# Altium PCB Power Board UCC28951.PcbDoc
Units mm, origin at the board's own origin, x right, y up, seen from the top; angles counter-clockwise.
Board outline 380 x 160 mm, 2 copper layers (Top Layer, Bottom Layer); 35 components, 230 nets, 139 pads, 0 vias.
Unrouted connection lines stored in the file: 72.
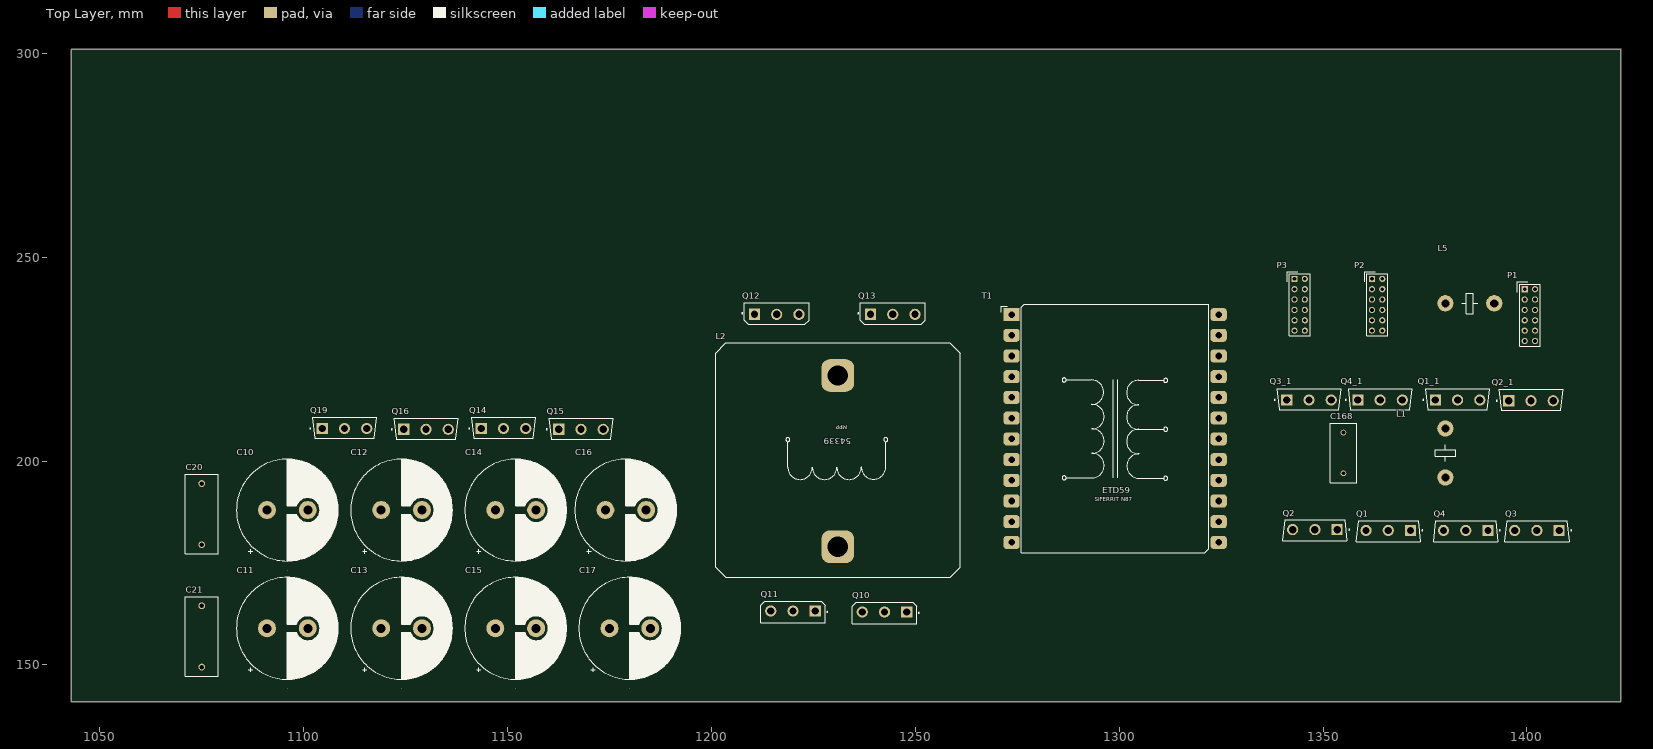
[diagram p0: Top Layer view]
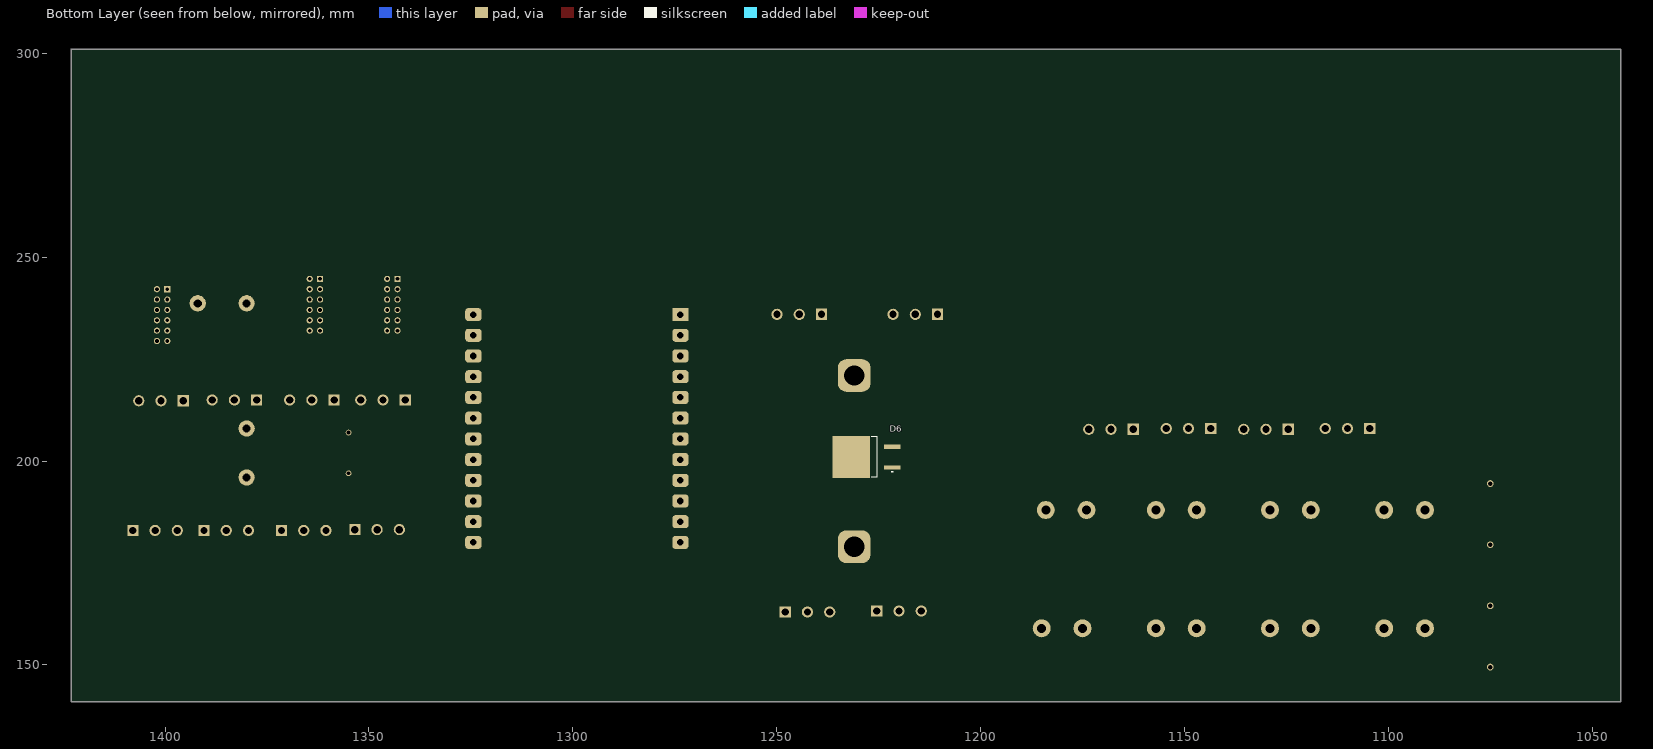
[diagram p1: Bottom Layer view, seen from below]

## Layer stack, top to bottom
Top Solder: solder mask 0.0254, SM-003, Dk 4
Top Layer: signal copper 0.0356
Dielectric 1: dielectric 0.32, FR-4, Dk 4.8
Bottom Layer: signal copper 0.0356
Bottom Solder: solder mask 0.0254, SM-003, Dk 4

## Board outline
1043,141 1423,141 1423,301 1043,301

## Design rules (kind name [scope] priority, off if disabled: settings)
Clearance "Schematic Clearance Constraint_1" [InNet('300V_HV')] p1: gap=1.27 ignorepadtopadclearanceinfootprint=FALSE except(0: Arc-Hole Track-Hole SMDPad-Hole THPad-Hole Via-Hole Fill-Hole Poly-Hole Region-Hole Text-Hole; 0.254: Arc-Text Track-Text SMDPad-Text THPad-Text Via-Text Fill-Text Poly-Text Region-Text Text-Text)
Clearance "Schematic Clearance Constraint" [InNet('LIVE')] p2: gap=1.27 ignorepadtopadclearanceinfootprint=FALSE except(0: Arc-Hole Track-Hole SMDPad-Hole THPad-Hole Via-Hole Fill-Hole Poly-Hole Region-Hole Text-Hole; 0.254: Arc-Text Track-Text SMDPad-Text THPad-Text Via-Text Fill-Text Poly-Text Region-Text Text-Text)
Clearance [All] p3: gap=0.254 ignorepadtopadclearanceinfootprint=FALSE except(0: Arc-Hole Track-Hole SMDPad-Hole THPad-Hole Via-Hole Fill-Hole Poly-Hole Region-Hole Text-Hole)
Height [All] p1: minheight=0 maxheight=80 prefheight=12.7
PolygonConnect [All] p1: connectstyle=Relief reliefconductorwidth=0.254 reliefentries=4 polygonreliefangle="90 Angle" airgapwidth=0.254
RoomDefinition "U_PCIE98 Break Out" [InComponentClass('U_PCIE98 Break Out')] p1: confinementstyle=ConfineIn formatcopy=TRUE lockcomponents=FALSE outline -27,-227 23.8,-227 23.8,-201.6 -27,-201.6
RoutingVias [All] p1: holewidth=0.711 width=1.27 viastyle="Through Hole" minholewidth=0.711 minwidth=1.27 maxholewidth=0.711 maxwidth=1.27
SolderMaskExpansion [All] p1: expansion=0.102 istentingtop=FALSE
Width [All] p1: maxlimit=0.254 minlimit=0.254 preferedwidth=0.254
29 further rules are at their usual default settings.

## Classes and differential pairs
component class "U_Synchronous Rectification Stage": Q10 Q11 Q12 Q13
component class "U_Fan Control": D7 D28
component class U_E_Switch_Outlet: Q14 Q15 Q16 Q19
component class "U_Power Circuit": C10 C11 C12 C13 C14 C15 C16 C17 C20 C21 C168 D6 L1 L2 Q1 Q2 Q3 Q4 T1
component class "U_EMI Stage Break Out": L5 P1 P2 P3

## Components (designator, comment, footprint, x,y, rotation, side; value= is the part's Value field where it differs from the comment)
C10 "Cap Pol1" 450V_25mm_Dia_10mm_pitch 1096,188 r0 top value=100pF
C11 "Cap Pol1" 450V_25mm_Dia_10mm_pitch 1096,159 r0 top value=100pF
C12 "Cap Pol1" 450V_25mm_Dia_10mm_pitch 1124,188 r0 top value=100pF
C13 "Cap Pol1" 450V_25mm_Dia_10mm_pitch 1124,159 r0 top value=100pF
C14 "Cap Pol1" 450V_25mm_Dia_10mm_pitch 1152,188 r0 top value=100pF
C15 "Cap Pol1" 450V_25mm_Dia_10mm_pitch 1152,159 r0 top value=100pF
C16 "Cap Pol1" 450V_25mm_Dia_10mm_pitch 1179,188 r0 top value=100pF
C17 "Cap Pol1" 450V_25mm_Dia_10mm_pitch 1180,159 r0 top value=100pF
C20 "1uF, 250V" L18_W7_H13_P15 1075,187 r270 top
C21 "1uF, 250V" L18_W7_H13_P15 1075,157 r270 top
C168 "47nF, 630V" L13_W5.5_H11_P10 1355,202 r90 top
D6 "MURB1620CTT4G" "DPAK254P1542X450-3N - diode" 1228,201 r0 bottom
L1 "Transformer_Inductor" "Shim Inductor" 1380,208 r270 top
L2 "Transformer_Inductor" Toroid_54439_2 1231,179 r90 top
L5 "Transformer_Inductor" "Shim Inductor" 1380,238.7 r0 top
P1 "Header 6X2H" Header_6X2 1399.46,242.16 r0 top
P2 "Header 6X2H" Header_6X2 1362,244.7 r0 top
P3 "Header 6X2H" Header_6X2 1343,244.7 r0 top
Q1 "STW55NM60ND" FP-TO-247-0075325-MFG#1 1366,182.8 r270 top
Q1_1 "STW55NM60ND" FP-TO-247-0075325-MFG#1 1383,215.2 r90 top (schematic designator Q1)
Q2 "STW55NM60ND" FP-TO-247-0075325-MFG#1 1348,183 r270 top
Q2_1 "STW55NM60ND" FP-TO-247-0075325-MFG#1 1401,215 r90 top (schematic designator Q2)
Q3 "STW55NM60ND" FP-TO-247-0075325-MFG#1 1402.45,182.8 r270 top
Q3_1 "STW55NM60ND" FP-TO-247-0075325-MFG#2 1346.55,215.2 r90 top (schematic designator Q3)
Q4 "STW55NM60ND" FP-TO-247-0075325-MFG#1 1385,182.8 r270 top
Q4_1 "STW55NM60ND" FP-TO-247-0075325-MFG#2 1364,215.2 r90 top (schematic designator Q4)
Q10 "IRFP240PBF" FP-E19-0614-MFG 1242.46,162.762 r270 top
Q11 "IRFP240PBF" FP-E19-0614-MFG 1220,163 r270 top
Q12 "IRFP240PBF" FP-E19-0614-MFG 1216,236.238 r90 top
Q13 "IRFP240PBF" FP-E19-0614-MFG 1244.46,236.238 r90 top
Q14 "STW55NM60ND" FP-TO-247-0075325-MFG#2 1149,208.2 r90 top
Q15 "STW55NM60ND" FP-TO-247-0075325-MFG#2 1168,208 r90 top
Q16 "STW55NM60ND" FP-TO-247-0075325-MFG#2 1130,208 r90 top
Q19 "STW55NM60ND" FP-TO-247-0075325-MFG#2 1110,208.2 r90 top
T1 "Transformer_Centre_Tap_Secondaru_Aux_1" ETD59 1299,208 r0 top

## Footprints (in the part's own frame and the unit in brackets; to place one, negate y for a bottom-side part, rotate by r counter-clockwise, add the part's x,y. Pads: shape width x height; smd on the part's side, far side on the other; paste and mask are expansions set on the pad)
450V_25mm_Dia_10mm_pitch [mm]
  round 4.4 hole 2.2: 1(-5,0) 2(5,0)
  silkscreen extent -12.5,-14.75 12.5,12.5, body extent -12.7,-12.7 12.7,12.7, height 42.7
"DPAK254P1542X450-3N - diode" [mm] "D2-PAK, 3-Pads, Body 7.60x8.36mm (max), IPC Medium Density"
  rect 3.95x1.05 smd: 1(-6.35,2.54) 3(-6.35,-2.54)
  rect 9.1x10.2 smd: 4(3.7,0)
  silkscreen extent -6.47,-5 -1.25,5, body extent -7.5,-5 7.5,5, height 4.67
ETD59 [mm]
  rect 4x3.2 hole 1.6: 1(-25.4,27.94)
  rrect50% 4x3.2 hole 1.6: 2(-25.4,22.86) 3(-25.4,17.78) 4(-25.4,12.7) 5(-25.4,7.62) 6(-25.4,2.54) 7(-25.4,-2.54) 8(-25.4,-7.62) 9(-25.4,-12.7) 10(-25.4,-17.78) 11(-25.4,-22.86) 12(-25.4,-27.94) 13(25.4,-27.94) 14(25.4,-22.86) 15(25.4,-17.78) 16(25.4,-12.7) 17(25.4,-7.62) 18(25.4,-2.54) 19(25.4,2.54) 20(25.4,7.62) 21(25.4,12.7) 22(25.4,17.78) 23(25.4,22.86) 24(25.4,27.94)
  silkscreen extent -27.9,-30.48 22.97,30.48, body extent -32.95,-35.86 33.15,31.04, height 51.31
FP-E19-0614-MFG [mm]
  rect 2.75x2.75 hole 1.8 paste-1000 mask+0: 1(-0.238,5.46)
  round 2.75 hole 1.8 paste-1000 mask+0: 2(-0.238,0) 3(-0.238,-5.46)
  silkscreen extent -2.66,-7.94 2.66,8.56, body extent -2.76,-8.04 2.76,8.04, height 0.25
FP-TO-247-0075325-MFG#1 [mm]
  rect 2.75x2.75 hole 1.8: 1(-0.2,5.45)
  round 2.75 hole 1.8: 2(-0.2,0) 3(-0.2,-5.45)
  silkscreen extent -2.58,-7.88 2.58,8.5, body extent -2.68,-7.98 2.68,7.98, height 0.25
FP-TO-247-0075325-MFG#2 [mm]
  rect 2.75x2.75 hole 1.8 paste-1000 mask+0: 1(-0.2,5.45)
  round 2.75 hole 1.8 paste-1000 mask+0: 2(-0.2,0) 3(-0.2,-5.45)
  silkscreen extent -2.58,-7.88 2.58,8.5, body extent -2.68,-7.98 2.68,7.98, height 0.25
Header_6X2 [mil]
  rect 60x60 hole 35.43: 1(0,0)
  round 60 hole 35.43: 2(100,0) 3(0,-100) 4(100,-100) 5(0,-200) 6(100,-200) 7(0,-300) 8(100,-300) 9(0,-400) 10(100,-400) 11(0,-500) 12(100,-500)
  silkscreen extent -70,-550 150,70, body extent -13,-550 495,50, height 200
L13_W5.5_H11_P10 [mm] "Film Capacitors, 13x5.5x11mm"
  round 1.4 hole 0.9: 1(-5,0) 2(5,0)
  silkscreen extent -7.25,-3.25 7.25,3.25, body extent -6.5,-2.75 6.5,2.75, height 11.05
L18_W7_H13_P15 [mm] "THT Film Capacitors, body 18x7mm"
  round 1.65 hole 1.1: 1(-7.5,0) 2(7.5,0)
  silkscreen extent -9.75,-4 9.75,4, body extent -9,-3.5 9,3.5, height 13.05
"Shim Inductor" [mm]
  round 4 hole 2: 1(0,0) 2(12,0)
  silkscreen extent 4,-2.5 8,2.5, body extent -0.86,-12.33 12.71,12.03, height 25.26
Toroid_54439_2 [mm]
  rrect50% 8x8 hole 5: 1(0,0) 2(42,0)
  silkscreen extent -7.5,-30 50,30, body extent -1.7,-27.59 44.3,27.79, height 57.26

## Part data
C10 C11 C12 C13 C14 C15 C16 C17: "Polarized Capacitor (Radial)", LatestRevisionDate=17-Jul-2002, LatestRevisionNote="Re-released for DXP Platform.", PackageDescription="Polarized Capacitor (Radial); 2 Leads", PackageReference=RB7.6-15, Published=8-Jun-2000, Publisher="Altium Limited"
C20 C21: library part 890273425007CS, "WCAP-FTBE THT Film Capacitors, 1uF, 250VDC", Capacitance=1uF, Insulation Resistance="3000Ohm x F", Operating Temperature="-40 to +85degC", Rate of Voltage Rise=11V/us, Rated Voltage=250VDC, ComponentLink1Description=Manufacturer, ComponentLink1URL=http://www.we-online.de, ComponentLink2Description=Datasheet, ComponentLink2URL=https://katalog.we-online.com/pbs/datasheet/890273425007CS.pdf, Dissipation Factor@1kHz=1%, Dissipation Factor@10kHz=1.5%, Dissipation Factor@100kHz=4.3%, Height=13mm, Length=18mm, Mounting Technology=THT, Packaging=Carton, Part Number=890273425007CS, Pitch=15mm, Published Date="August 2019", Publisher="Wurth Elektronik", Technical Reference=MPSP015105K250DCPP45004, Width=7mm
C168: library part 890303323004CS, "WCAP-FTBP THT Film Capacitors, 47nF, 630VDC", Capacitance=47nF, Insulation Resistance=30000MOhm, Operating Temperature="-40 to +105degC", Rate of Voltage Rise=430V/us, Rated Voltage=630VDC, ComponentLink1Description=Manufacturer, ComponentLink1URL=http://www.we-online.de, ComponentLink2Description=Datasheet, ComponentLink2URL=https://katalog.we-online.com/pbs/datasheet/890303323004CS.pdf, Dissipation Factor@1kHz=0.1%, Dissipation Factor@10kHz=10%, Dissipation Factor@100kHz=0.29%, Height=11mm, Length=13mm, Mounting Technology=THT, Packaging=Carton, Part Number=890303323004CS, Pitch=10mm, Published Date="August 2019", Publisher="Wurth Elektronik", Technical Reference=MPPP010473J630DCPP55004, Width=5.5mm
D6: library part CMP-0902-00228-1, "SWITCHMODE(TM) Power Rectifier, 3-Pin D2PAK, Pb-Free, Tape and Reel", Manufacturer="On Semiconductor", ComponentLink1Description="Manufacturer URL", ComponentLink1URL=http://www.onsemi.com/, ComponentLink2Description=Datasheet, ComponentLink2URL=http://www.onsemi.cn/pub_link/Collateral/MURB1620CT-D.PDF, ComponentLink3Description="Package Specification", ComponentLink3URL=http://www.onsemi.com/pub_link/Collateral/418B-04.PDF, DatasheetVersion="Rev. 7", IFSM Max (A)=100, Mounting Technology="Surface Mount", PackageDescription="3-Pin Flange Mount, Body 9.145 x 9.97 mm, Pitch 2.54 mm", PackageReference=D2PAK-3-418B-04, PackageVersion="Rev. K, 09/2008", Packing="Tape and Reel", PartNumber=MURB1620CTT4G, RoHS=TRUE, Type=Ultrafast, VRRM Max (V)=200
P1 P2 P3: "Header, 6-Pin, Dual row, Right Angle", LatestRevisionDate=17-Jul-2002, LatestRevisionNote="Re-released for DXP Platform.", Publisher="Altium Limited"
Q1 Q1_1 Q2 Q2_1 Q3 Q3_1 Q4 Q4_1 Q14 Q15 Q16 Q19: library part CMP-12198-000021-1, "MOSFET N-CH 600V 51A TO-247", Continuous Drain Current=51A, Drain To Source Breakdown Voltage=600V, Drain To Source Resistance=0.047Ω, Gate To Source Voltage=25V, Input Capacitace At Vds="5800pF @ 50V", Manufacturer=STMicroelectronics, Max Forward Diode Voltage=1.3V, Max Junction Temp=+150°C, Package=TO-247-0075325, Power Dissipation=350W, Pulse Drain Current=204A, Temperature="to +150°C", Automotive=No, Category=Trans, ComponentLink2Description=Datasheet, ComponentLink2URL=https://www.mouser.in/datasheet/2/389/en.CD00176812-1218252.pdf, Depletion Mode=False, Device Class L1="Discrete Semiconductors", Device Class L2=Transistors, Device Class L3=MOSFETs, Digikey Description="MOSFET N-CH 600V 51A TO-247", Drain To Source Voltage=600V, Gate Charge At Vgs="190nC @ 10V", Height=24.45mm, Ipc Land Pattern Name=TO-220, Lead Free=Yes, Manufacturer Part Number=STW55NM60ND, Mouser Description="MOSFET N-channel 600 V FDMesh", Number Of Channels=1, Number Of N Channels=1, Obsolete Part=true, Octopart=https://octopart.com/stw55nm60nd-stmicroelectronics-8600607, Reverse Recovery Charge=1800nC, Reverse Recovery Time=200ns, RoHS=TRUE, Rthja Max=50°C/W, Standoff Height=3.7mm, Temperature Range High=+150°C, Threshold Vgs Max=5V, Threshold Vgs Min=3V, Transconductance=45S, Turn Off Delay Time=188ns, Turn On Delay Time=33ns
Q10 Q11 Q12 Q13: library part CMP-02550-000013-1, "MOSFET N-CH 200V 20A TO-247AC", Continuous Drain Current=20A, Drain To Source Breakdown Voltage=200V, Drain To Source Resistance=0.18Ω, Gate To Source Voltage=20V, Input Capacitace At Vds="1300pF @ 25V", Manufacturer=Vishay, Max Forward Diode Voltage=2V, Max Junction Temp=+150°C, Package=E19-0614, Power Dissipation=150W, Pulse Drain Current=80A, Temperature="-55°C to +150°C", Temperature Range Low=-55°C, Automotive=No, Category=Trans, ComponentLink2Description=Datasheet, ComponentLink2URL=http://www.vishay.com/docs/91210/91210.pdf, Depletion Mode=False, Device Class L1="Discrete Semiconductors", Device Class L2=Transistors, Device Class L3=MOSFETs, Digikey Description="MOSFET N-CH 200V 20A TO-247AC", Drain To Source Voltage=200V, Gate Charge At Vgs="70nC @ 10V", Height=25.11mm, Ipc Land Pattern Name=TO-220, Lead Free=Yes, Manufacturer Part Number=IRFP240PBF, Mouser Description="MOSFET N-Chan 200V 20 Amp", Number Of Channels=1, Number Of N Channels=1, Octopart=https://octopart.com/irfp240pbf-vishay-46527395, Reverse Recovery Charge=3400nC, Reverse Recovery Time=300ns, RoHS=TRUE, Rthja Max=40°C/W, Standoff Height=3.71mm, Technology=MOSFET, Temperature Range High=+150°C, Threshold Vgs=4V, Threshold Vgs Max=4V, Threshold Vgs Min=2V, Turn Off Delay Time=45ns, Turn On Delay Time=14ns

## Nets (pads, with @x,y where several pads share a name; then routed paths per layer and width w, separated by ;. In a path a pad name is that pad's centre, name@x,y a point inside that pad or via, vN(x,y) a via of type N, cw(c..) or ccw(c..) an arc to the next point about the centre after c; other vN are vias at no path point)
2.5V_C: 
3.3V_TEMP_BUS: 
5V_A: 
5V_C: 
12V_E_SW: 
15V_A: 
15V_A_UR: 
15V_B: 
15V_B_UR: 
15V_C: 
120_UFA-: D6.1 Q12.2 Q13.2 T1.7
120_UFB-: D6.3 Q10.2 Q11.2 T1.5
120V_LV: C10.1 C11.1 C12.1 C13.1 C14.1 C15.1 C16.1 C17.1 C20.2 C21.2 L2.2
120V_OUT: Q15.2 Q19.2
120V_Sense: 
300V_HV: L5.2
300V_HV_PFC: L5.1 P1.1 P1.2 P1.3 P1.4 P1.5 P1.6 P1.7 P1.8 P1.9 P1.10 P1.11 P1.12
300V_HV_Sense: Q1.2 Q2.2 Q3.2 Q4.2
-5V_1: 
-5V_2: 
-5V_A: 
-5V_B: 
-5V_C: 
-5V_E_SW: 
ACS_HV_OUT: 
ACS_HV_OUT_AMP: 
ACS_LV_OUT: 
ACS_LV_OUT_AMP: 
AMC_HV_OUT: 
DIS1: 
DIS2: 
E_SW_Clamp: Q14.1 Q14.2 Q15.1 Q16.1 Q16.2 Q19.1
E_SW_Control: 
E_SW_G: 
ENFAN: 
ENSRG: 
FAN_PWM_A: 
FAN_PWM_B: 
GND_E_SW: Q14.3 Q15.3 Q16.3 Q19.3
GND_HV: P2.1 P2.2 P2.3 P2.4 P2.5 P2.6 P2.7 P2.8 P2.9 P2.10 P2.11 P2.12
GND_LV: C10.2 C11.2 C12.2 C13.2 C14.2 C15.2 C16.2 C17.2 C20.1 C21.1 Q10.3 Q11.3 Q12.3 Q13.3
GNDA: 
GNDB: 
INA1: 
INA2: 
INB1: 
INB2: 
LIVE: 
NetC1_1: 
NetC8_1: D6.4
NetC28_1: 
NetC30_1: 
NetC30_2: 
NetC34_2: 
NetC40_1: 
NetC40_2: 
NetC41_1: 
NetC42_1: 
NetC46_2: 
NetC55_1: 
NetC56_1: 
NetC58_1: 
NetC58_2: 
NetC62_2: 
NetC68_1: 
NetC68_2: 
NetC69_1: 
NetC70_1: 
NetC74_2: 
NetC81_1: 
NetC82_1: 
NetC82_2: 
NetC87_1: 
NetC87_2: 
NetC88_1: 
NetC88_2: 
NetC93_1: 
NetC93_2: 
NetC97_1: 
NetC97_2: 
NetC98_1: 
NetC103_2: 
NetC106_2: 
NetC108_1: 
NetC108_2: 
NetC109_1: 
NetC109_2: 
NetC110_1: 
NetC110_2: 
NetC117_2: 
NetC120_1: 
NetC120_2: 
NetC121_2: 
NetC123_1: 
NetC124_2: 
NetC125_1: 
NetC125_2: 
NetC128_2: 
NetC135_1: 
NetC135_2: 
NetC136_1: 
NetC136_2: 
NetC143_1: 
NetC144_1: 
NetC144_2: 
NetC145_1: 
NetC155_1: 
NetC155_2: 
NetC156_1: 
NetC156_2: 
NetC157_1: 
NetC157_2: 
NetC158_1: 
NetC158_2: 
NetC168_2: C168.2 L1.2 T1.1
NetC169_2: 
NetC171_2: 
NetC173_2: 
NetC180_2: 
NetC183_2: 
NetD1_1: Q3.1
NetD1_2: 
NetD2_1: Q4.1
NetD2_2: 
NetD3_1: Q1.1
NetD3_2: 
NetD4_1: Q2.1
NetD4_2: 
NetD7_1: 
NetD9_1: 
NetD9_2: 
NetD10_1: 
NetD10_2: 
NetD11_1: 
NetD11_2: 
NetD12_1: 
NetD12_2: 
NetD13_1: 
NetD14_1: 
NetD16_1: Q12.1
NetD16_2: 
NetD17_1: Q13.1
NetD17_2: 
NetD18_1: Q10.1
NetD18_2: 
NetD19_1: Q11.1
NetD19_2: 
NetD25_3: 
NetD28_1: 
NetL2_1: L2.1 T1.6
NetP7_1: 
NetP7_2: 
NetP8_1: 
NetP10_1: 
NetP10_2: 
NetP11_1: 
NetP11_2: 
NetP11_3: 
NetP11_5: 
NetP12_1: 
NetP12_2: 
NetP12_3: 
NetP12_5: 
NetP13_1: 
NetP13_2: 
NetP13_3: 
NetP13_5: 
NetP14_1: 
NetP14_2: 
NetP14_3: 
NetP14_5: 
NetP15_3: 
NetP16_3: 
NetQ17_1: 
NetQ18_1: 
NetR30_2: 
NetR35_2: 
NetR46_2: 
NetR47_1: 
NetR54_2: 
NetR55_1: 
NetR62_2: 
NetR63_2: 
NetR66_1: 
NetR85_1: 
NetR92_2: 
NetR94_1: 
NetR95_3: 
NetR98_1: 
NetR100_1: 
NetR104_1: 
NetR117_1: 
NetR119_1: 
NetR120_1: 
NetR122_1: 
NetR130_1: 
NetR139_1: 
NetR150_2: 
NetR152_1: 
NetR153_3: 
NetR172_1: 
NetSB45_1: 
NetSB47_1: 
NetSB49_2: 
NetSB51_2: 
NetSB53_2: 
NEUTRAL: 
OP+: 
OP-: 
OP_LVS_+: 
OP_LVS_-: 
OUT_FAN_PWM_A: 
OUT_FAN_PWM_B: 
OUT_RECTIFIER_A: 
OUT_RECTIFIER_B: 
OUTA1: 
OUTA2: 
OUTB1: 
OUTB2: 
Reverse_Polarity: 
SRG_A: 
SRG_B: 
SWN1: C168.1 L1.1 Q3.3 Q4.3
SWN2: Q1.3 Q2.3 T1.2
T1_SMB_INT: 
T1_SMB_RST: 
T1_SMB_SCL: 
T1_SMB_SDA: 
TACH_OUT_FAN__A: 
TACH_OUT_FAN__B: 
pads on no net: P3.1 P3.2 P3.3 P3.4 P3.5 P3.6 P3.7 P3.8 P3.9 P3.10 P3.11 P3.12 Q1_1.1 Q1_1.2 Q1_1.3 Q2_1.1 Q2_1.2 Q2_1.3 Q3_1.1 Q3_1.2 Q3_1.3 Q4_1.1 Q4_1.2 Q4_1.3 T1.3 T1.4 T1.8 T1.9 T1.10 T1.11 T1.12 T1.13 T1.14 T1.15 T1.16 T1.17 T1.18 T1.19 T1.20 T1.21 T1.22 T1.23 T1.24

## Silkscreen, mask and mechanical layers (free items; w line width, h text height)
Mechanical 4:
  lines w0.254: 1423,301 1043,301 1043,141 1423,141 1423,301 ; 1423,301 1423,301

## Dimensions
1423,301 to 1423,141 on Mechanical 4
1043,301 to 1423,301 on Mechanical 4

## Text inside footprints (layer, text, board x,y; h text height)
L2: Top Overlay "54339" at 1234.269,205.661 h1.52 r180; Top Overlay "MPP" at 1233.246,208.746 h1 r180
T1: Top Overlay "SIFERRIT N87" at 1294.054,190.154 h1; Top Overlay "ETD59" at 1295.854,192.154 h1.52